# Altium PCB Ultrasonic_mbed_casa.PcbDoc
Units mm, origin at the board's own origin, x right, y up, seen from the top; angles counter-clockwise.
Board outline 100 x 86.6 mm, 2 copper layers (Top Layer, Bottom Layer); 20 components, 28 nets, 116 pads, 8 vias.
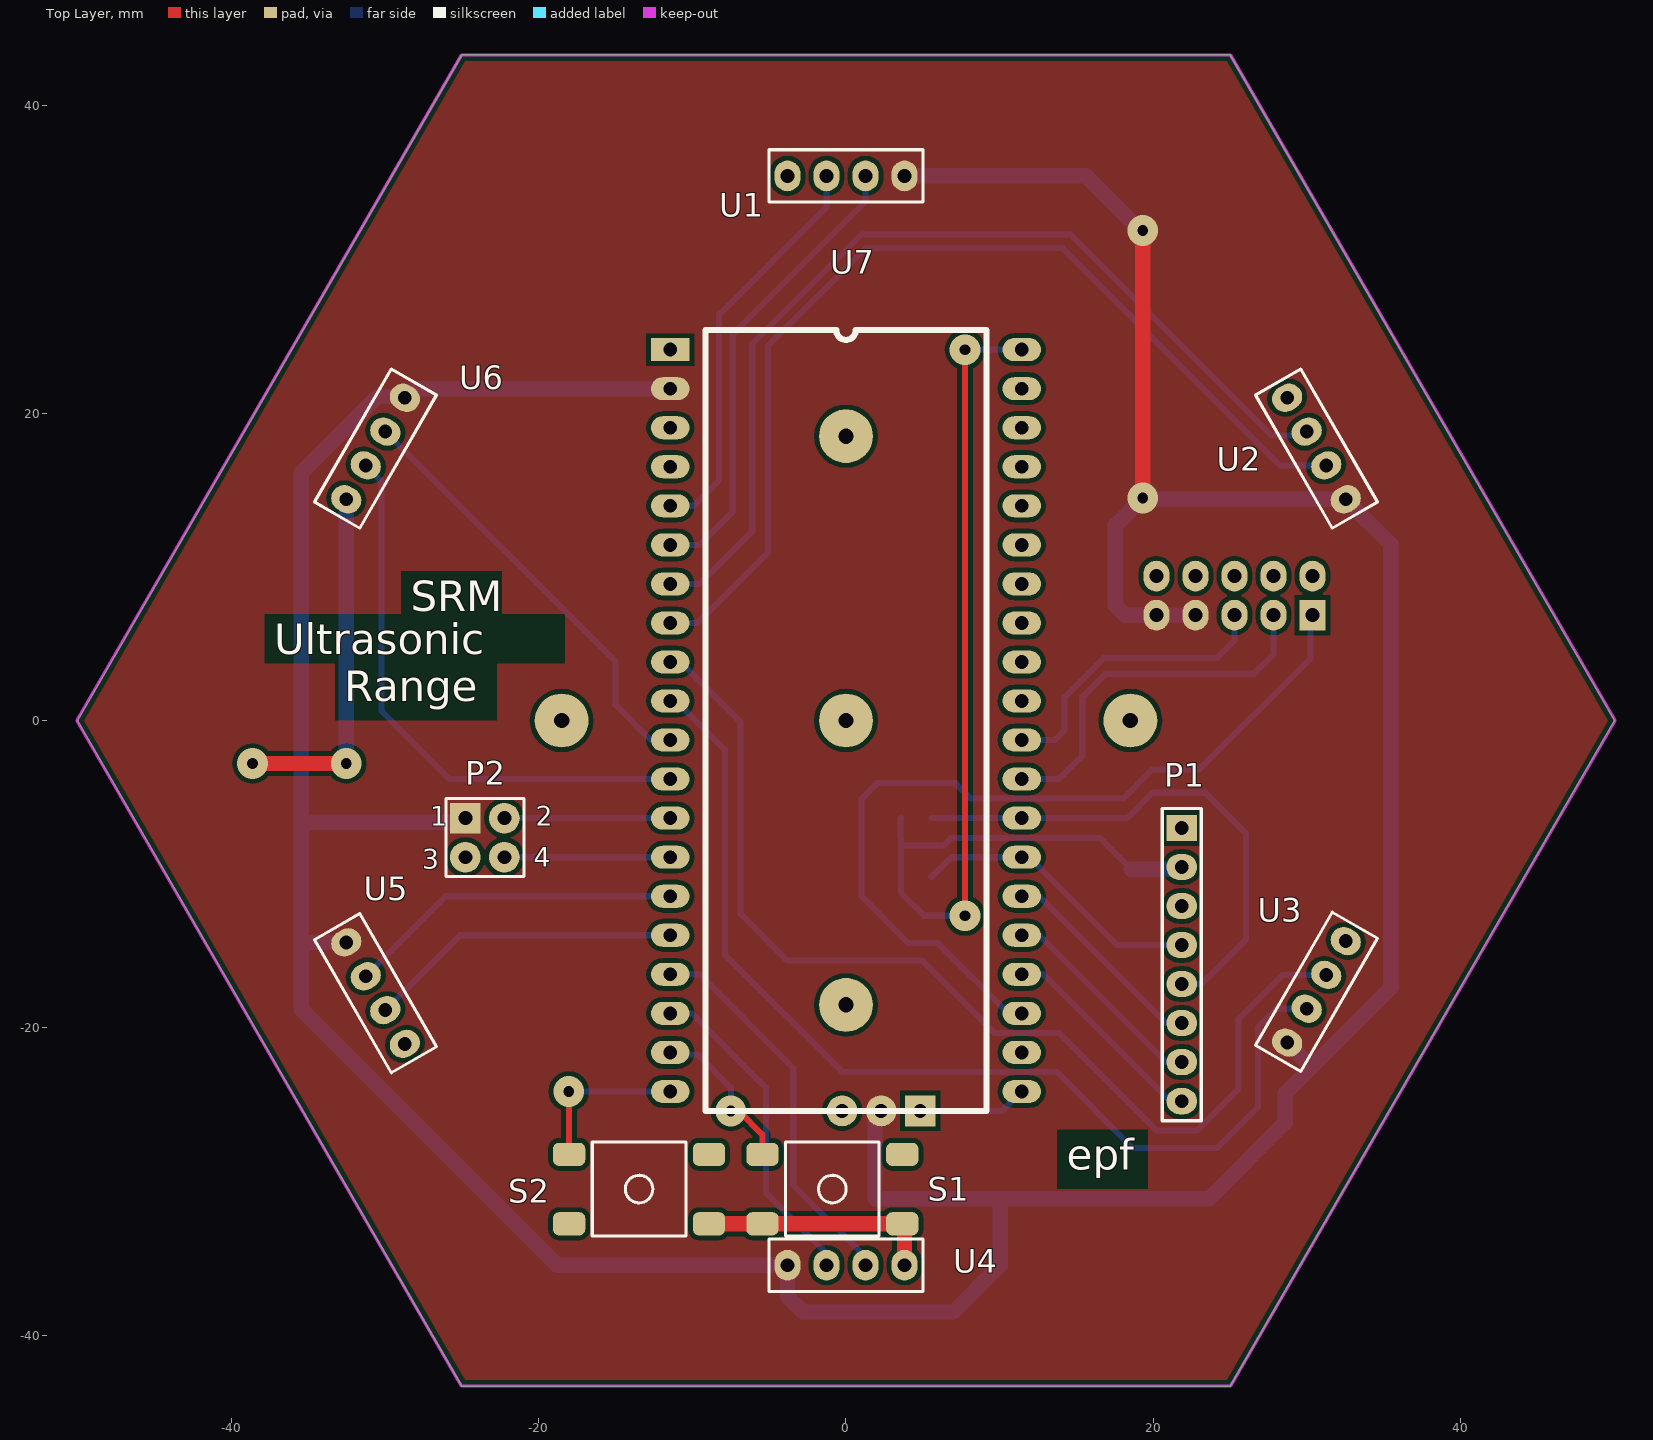
[diagram p0: Top Layer view]
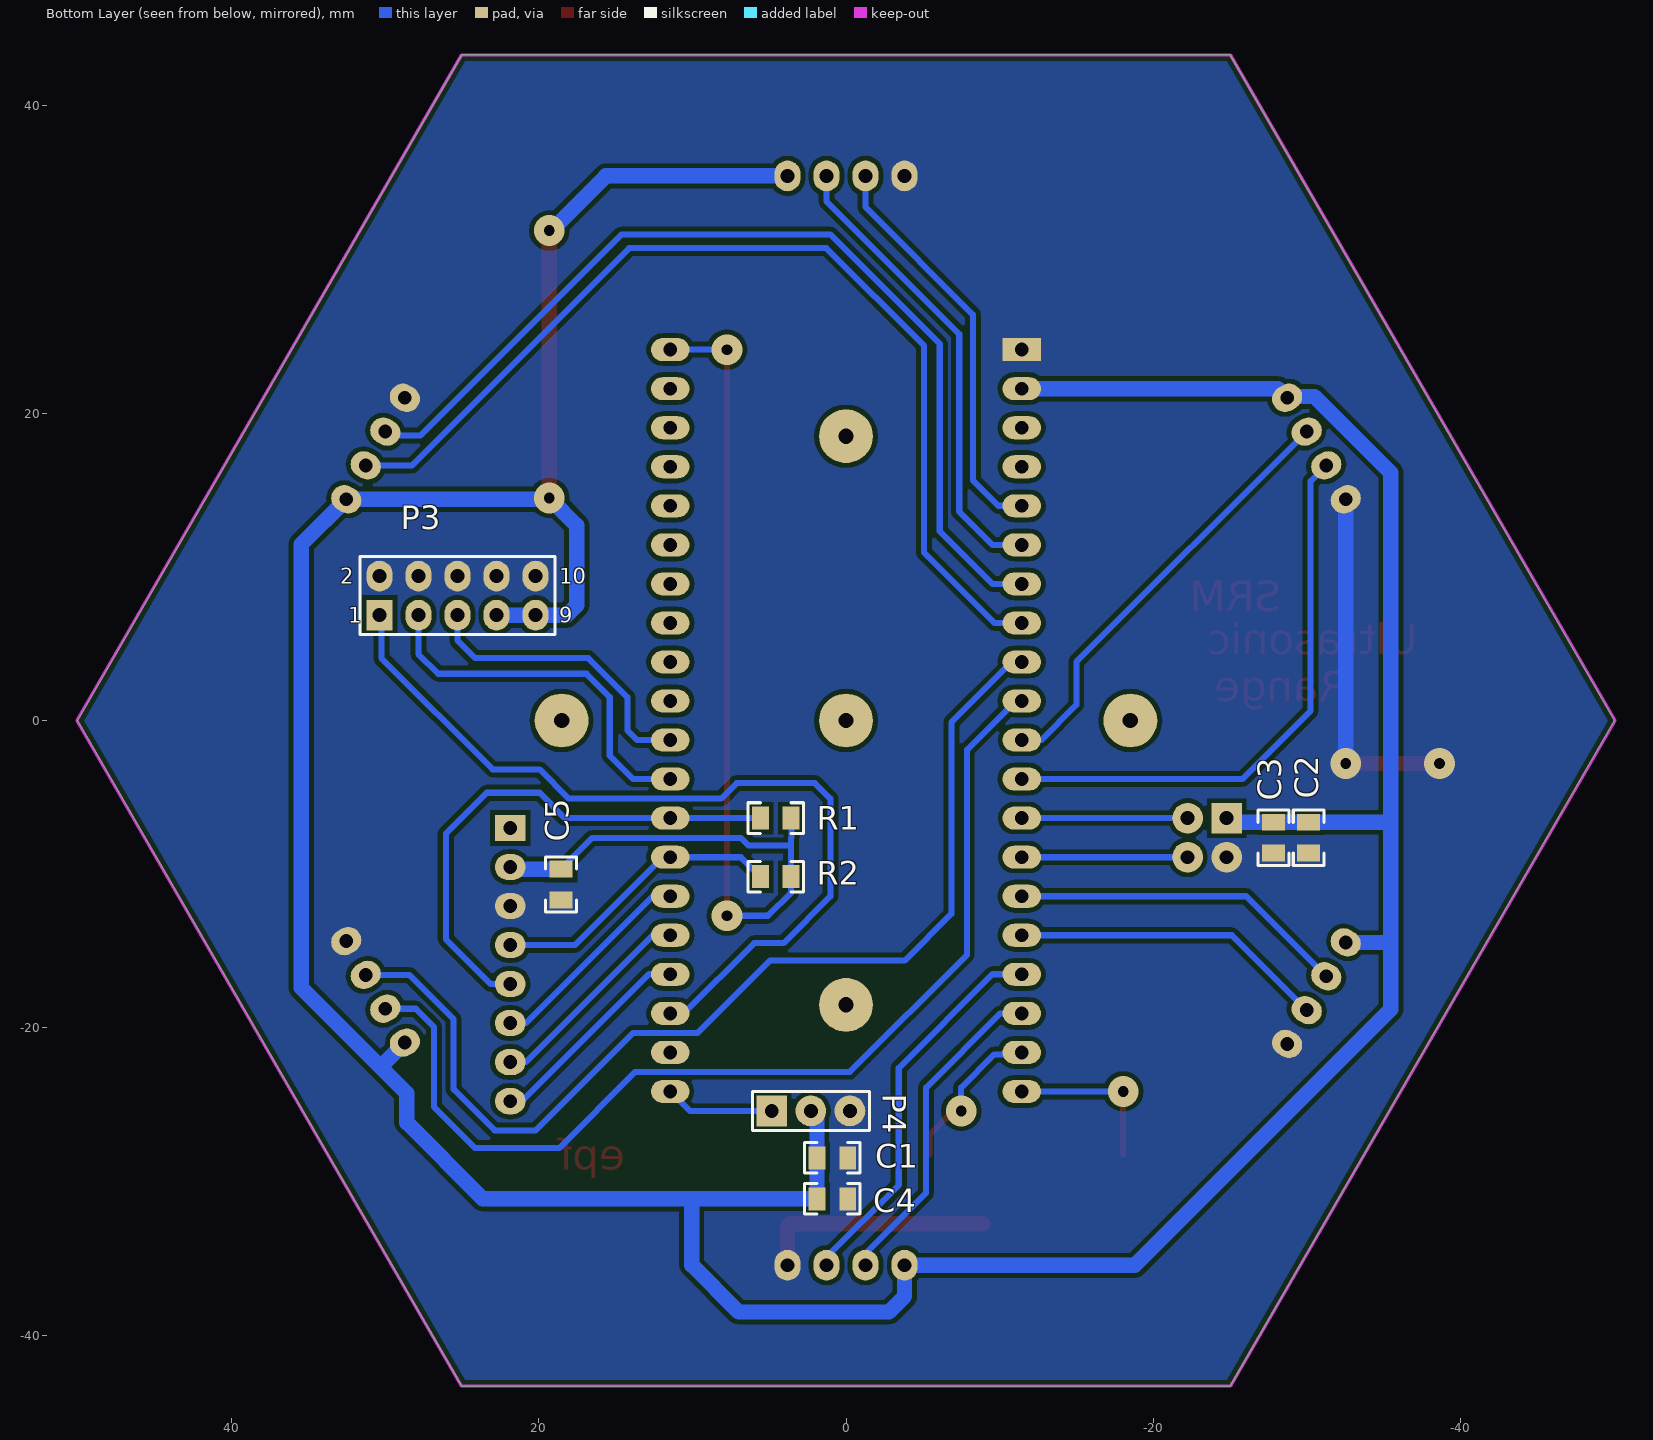
[diagram p1: Bottom Layer view, seen from below]

## Layer stack, top to bottom
Top Layer: signal copper 0.0356
Dielectric: dielectric 0.32, FR-4, Dk 4.8
Bottom Layer: signal copper 0.0356

## Board outline
25,-43.301 50,0 25,43.301 -25,43.301 -50,0 -25,-43.301

## Design rules (kind name [scope] priority, off if disabled: settings)
Clearance [All] p1: gap=0.3
MinimumAnnularRing [All] p1: minimumring=0.254
PolygonConnect [All] p1: connectstyle=Direct reliefconductorwidth=0.254 reliefentries=4 polygonreliefangle="90 Angle"
RoutingVias [All] p1: holewidth=0.8 width=1.5 viastyle="Through Hole" minholewidth=0.4 minwidth=0.9 maxholewidth=2 maxwidth=3
SilkscreenOverComponentPads [All] p1: minsilkscreentomaskgap=0.254
SolderMaskExpansion [All] p1: expansion=0.102
Width [All] p1: maxlimit=3 minlimit=0.3 preferedwidth=0.4
27 further rules are at their usual default settings.

## Components (designator, comment, footprint, x,y, rotation, side; value= is the part's Value field where it differs from the comment)
C1 "Capacitor" CAP0805 0.889,-28.448 r0 bottom
C2 "Capacitor" CAP0805 -30.099,-7.62 r90 bottom
C3 "Capacitor" CAP0805 -27.813,-7.62 r90 bottom
C4 "Capacitor" CAP0805 0.889,-31.115 r0 bottom
C5 "Capacitor" CAP0805 18.542,-10.668 r90 bottom
P1 "Header 8" HDR1X8 21.844,-6.985 r270 top
P2 "Header 2X2" HDR2X2 -24.765,-6.35 r270 top
P3 "NXT" HDR2X5 30.353,6.858 r180 bottom
P4 "Servo" HDR1X3 4.826,-25.4 r180 bottom
R1 "Resistor" RES0805 4.572,-6.35 r0 bottom
R2 "Resistor" RES0805 4.572,-10.16 r0 bottom
S1 "SW-PB" "SW-PB6mm - 2" -0.889,-30.48 r0 top
S2 "SW-PB" "SW-PB6mm - 2" -13.462,-30.48 r0 top
U1 "HC-SR04" HC-SR04 3.81,35.433 r180 top
U2 "HC-SR04" HC-SR04 32.512,14.397 r120 top
U3 "HC-SR04" HC-SR04 28.702,-20.95 r60 top
U4 "HC-SR04" HC-SR04 -3.81,-35.433 r0 top
U5 "HC-SR04" HC-SR04 -32.512,-14.437 r300 top
U6 "HC-SR04" HC-SR04 -28.702,20.996 r240 top
U7 "mbed" mbed -11.43,24.13 r0 top

## Footprints (in the part's own frame and the unit in brackets; to place one, negate y for a bottom-side part, rotate by r counter-clockwise, add the part's x,y. Pads: shape width x height; smd on the part's side, far side on the other; paste and mask are expansions set on the pad)
CAP0805 [mm]
  rect 1.1x1.5 smd: 1(-1,0) 2(1,0)
  silkscreen extent -1.8,-1 1.8,1, body extent -1,-0.62 1,0.63, height 0.5
HC-SR04 [mm]
  oval 1.7x2 hole 0.9: 1(0,0) 2(2.54,0) 3(5.08,0) 4(7.62,0)
  silkscreen extent -1.19,-1.7 8.81,1.7, body extent -17.74,-15.82 25.26,0.18, height 21.13
HDR1X3 [mm] "Connector; Header; 3 Position"
  rect 2x2 hole 0.9: 1(0,0)
  round 2 hole 0.9: 2(2.54,0) 3(5.08,0)
  silkscreen extent -1.27,-1.27 6.35,1.27
HDR1X8 [mm] "Connector; Header; 8 Position"
  rect 1.7x2 hole 0.9: 1(0,0)
  oval 1.7x2 hole 0.9: 2(2.54,0) 3(5.08,0) 4(7.62,0) 5(10.16,0) 6(12.7,0) 7(15.24,0) 8(17.78,0)
  silkscreen extent -1.27,-1.27 19.05,1.27
HDR2X2 [mm] "Connector; Header; 2x2 Position"
  rect 2x2 hole 0.9: 1(0,0)
  round 2 hole 0.9: 2(0,2.54) 3(2.54,0) 4(2.54,2.54)
  silkscreen extent -1.27,-1.27 3.81,3.81
HDR2X5 [mm] "Connector; Header; 5x2 Position"
  rect 1.7x2 hole 0.9: 1(0,0)
  oval 1.7x2 hole 0.9: 2(0,2.54) 3(2.54,0) 4(2.54,2.54) 5(5.08,0) 6(5.08,2.54) 7(7.62,0) 8(7.62,2.54) 9(10.16,0) 10(10.16,2.54)
  silkscreen extent -1.27,-1.27 11.43,3.81, body extent -1.27,-1.27 11.41,3.81, height 8.55
mbed [mm]
  rect 2.5x1.5 hole 0.9: 1(0,0)
  oval 2.5x1.5 hole 0.9: 2(0,-2.54) 3(0,-5.08) 4(0,-7.62) 5(0,-10.16) 6(0,-12.7) 7(0,-15.24) 8(0,-17.78) 9(0,-20.32) 10(0,-22.86) 11(0,-25.4) 12(0,-27.94) 13(0,-30.48) 14(0,-33.02) 15(0,-35.56) 16(0,-38.1) 17(0,-40.64) 18(0,-43.18) 19(0,-45.72) 20(0,-48.26) 21(22.86,-48.26) 22(22.86,-45.72) 23(22.86,-43.18) 24(22.86,-40.64) 25(22.86,-38.1) 26(22.86,-35.56) 27(22.86,-33.02) 28(22.86,-30.48) 29(22.86,-27.94) 30(22.86,-25.4) 31(22.86,-22.86) 32(22.86,-20.32) 33(22.86,-17.78) 34(22.86,-15.24) 35(22.86,-12.7) 36(22.86,-10.16) 37(22.86,-7.62) 38(22.86,-5.08) 39(22.86,-2.54) 40(22.86,0)
  silkscreen extent 2.29,-49.53 20.57,1.27
RES0805 [mm]
  rect 1.1x1.5 smd: 1(-1,0) 2(1,0)
  silkscreen extent -1.8,-1 1.8,1, body extent -1,-0.62 1,0.63, height 0.5
"SW-PB6mm - 2" [mm]
  rrect50% 2.1x1.5 smd: 1(-4.55,2.26) 1(4.55,2.26) 2(-4.55,-2.26) 2(4.55,-2.26)
  silkscreen extent -3.05,-3.05 3.05,3.05, body extent -4.5,-3 4.5,3, height 5

## Part data
C1 C2 C3 C4 C5: library part Cap
P1: "Header, 8-Pin"
P2: "Header, 2-Pin, Dual row"
P3: library part "Header 5X2", "Header, 5-Pin, Dual row"
P4: library part "Header 3", "Header, 3-Pin"
R1 R2: library part Res
S1 S2: "Switch"
U1 U2 U3 U4 U5 U6: "Ultrasonic module"

## Free pads (board coordinates)
  round 3.5 hole 1: 1(-18.5,0) 1(0,-18.5) 1(0,0) 1(0,18.5) 1(18.5,0)

## Via types
v1: diameter 2, hole 0.7, Top Layer to Bottom Layer, 8 vias

## Nets (pads, with @x,y where several pads share a name; then routed paths per layer and width w, separated by ;. In a path a pad name is that pad's centre, name@x,y a point inside that pad or via, vN(x,y) a via of type N, cw(c..) or ccw(c..) an arc to the next point about the centre after c; other vN are vias at no path point)
3V3: C5.2 P1.2 R1.1 R2.1 U7.40 | length 69.5
  Top Layer w0.4: v1(7.747,-12.7) v1(7.747,24.13)
  Bottom Layer w0.4: R1.1 3.556,-6.366 3.556,-7.62 3.572,-7.636 3.572,-8.128 ; v1(7.747,-12.7) 5.08,-12.7 3.572,-11.192 R2.1 3.572,-8.128 ; v1(7.747,24.13) U7.40 ; C5.2 16.514,-7.64 6.838,-7.64 6.35,-8.128 3.572,-8.128
  Bottom Layer w1: C5.2 21.701,-9.668 P1.2
A_INT1: P1.7 U7.25 | length 13.8
  Bottom Layer w0.4: U7.25 12.573,-13.97 20.828,-22.225 P1.7
ECHO1: U1.3 U7.5 | length 26.6
  Bottom Layer w0.4: U7.5 -9.906,13.97 -8.255,15.621 -8.255,26.416 -1.27,33.401 U1.3
ECHO2: U2.3 U7.7 | length 63.5
  Bottom Layer w0.4: U7.7 -9.525,8.89 -6.096,12.319 -6.096,24.511 1.016,31.623 14.605,31.623 27.686,18.542 29.718,18.542 U2.3
ECHO3: U3.3 U7.9 | length 69.5
  Bottom Layer w0.4: U7.9 -10.795,3.81 -6.858,-0.127 -6.858,-12.573 -3.81,-15.621 4.953,-15.621 9.652,-20.32 13.843,-20.32 20.193,-26.67 22.86,-26.67 25.527,-24.003 25.527,-19.431 28.407,-16.551 U3.3
ECHO4: U4.3 U7.17 | length 25.3
  Bottom Layer w0.4: U7.17 -9.525,-16.51 -3.429,-22.606 -3.429,-30.226 1.27,-34.925 U4.3
ECHO5: U5.3 U7.16 | length 20.6
  Bottom Layer w0.4: U5.3 -25.105,-13.97 U7.16
ECHO6: U6.3 U7.12 | length 37
  Bottom Layer w0.4: U6.3 -30.226,15.58 -30.226,0.635 -25.781,-3.81 U7.12
G_INT: P1.8 U7.24 | length 13.8
  Bottom Layer w0.4: U7.24 12.827,-16.51 21.082,-24.765 P1.8
GND: C1.1 C2.1 C3.1 C4.1 C5.1 P1.3 P2.3 P3.2 P3.4 P3.6 P3.8 P3.10 P4.3 S1.2 S2.2@-8.912,-32.74 U1.4 U2.4 U3.4 U4.4 U5.4 U6.4 U7.1 | length 38.6
  Top Layer w1: v1(-38.608,-2.794) v1(-32.512,-2.794) ; S2.2@-8.912,-32.74 -5.439,-32.74 3.661,-32.74 3.81,-32.889 U4.4
  Bottom Layer w1: v1(-32.512,-2.794) U6.4
M_DRDY: P1.6 U7.26 | length 13.8
  Bottom Layer w0.4: U7.26 12.573,-11.43 20.828,-19.685 P1.6
NXT1: P3.1 U7.23 | length 56.6
  Bottom Layer w0.4: U7.23 10.541,-19.05 5.969,-14.478 4.064,-14.478 1.016,-11.43 1.016,-5.08 2.032,-4.064 7.112,-4.064 8.128,-5.08 18.034,-5.08 19.939,-3.175 22.987,-3.175 30.226,4.064 30.226,6.731 P3.1
NXT2: P3.3 U7.29 | length 24.5
  Bottom Layer w0.4: U7.29 13.843,-3.81 15.367,-2.286 15.367,1.524 16.891,3.048 26.543,3.048 27.813,4.318 P3.3
NXT3: P3.5 U7.30 | length 19.4
  Bottom Layer w0.4: U7.30 13.589,-1.27 14.224,-0.635 14.224,1.524 16.764,4.064 24.13,4.064 25.273,5.207 P3.5
PB1: S1.1@-5.439,-28.22 U7.19 | length 10.4
  Top Layer w0.4: v1(-7.493,-25.4) -6.985,-25.4 -5.439,-26.946 S1.1@-5.439,-28.22
  Bottom Layer w0.4: U7.19 -11.303,-21.717 -9.652,-21.717 -7.493,-23.876 v1(-7.493,-25.4)
PB2: S2.1@-18.012,-28.22 U7.20 | length 10.7
  Top Layer w0.4: v1(-18.034,-24.13) -18.012,-24.152 S2.1@-18.012,-28.22
  Bottom Layer w0.4: v1(-18.034,-24.13) U7.20
RX: P2.4 U7.14 | length 10.8
  Bottom Layer w0.4: P2.4 U7.14
SCL: P1.4 R2.2 U7.27 | length 19.2
  Bottom Layer w0.4: R2.2 6.842,-8.89 U7.27 11.938,-8.89 17.653,-14.605 P1.4
SDA: P1.5 R1.2 U7.28 | length 34.5
  Bottom Layer w0.4: R1.2 U7.28 18.288,-6.35 19.939,-4.699 23.368,-4.699 26.035,-7.366 26.035,-14.224 23.114,-17.145 P1.5
SERVO1: P4.1 U7.21 | length 7.1
  Bottom Layer w0.4: P4.1 10.16,-25.4 U7.21
TRIG1: U1.2 U7.6 | length 30.4
  Bottom Layer w0.4: U7.6 -9.525,11.43 -7.366,13.589 -7.366,25.146 1.27,33.782 U1.2
TRIG2: U2.2 U7.8 | length 66.5
  Bottom Layer w0.4: U7.8 -9.652,6.35 -5.08,10.922 -5.08,24.384 1.27,30.734 14.097,30.734 28.235,16.596 U2.2
TRIG3: U3.2 U7.10 | length 68.1
  Bottom Layer w0.4: U7.10 -11.049,1.27 -7.874,-1.905 -7.874,-15.24 -0.254,-22.86 13.716,-22.86 18.669,-27.813 24.13,-27.813 26.797,-25.146 26.797,-19.939 27.986,-18.75 U3.2
TRIG4: U4.2 U7.18 | length 21.4
  Bottom Layer w0.4: U7.18 -10.033,-19.05 -5.207,-23.876 -5.207,-30.734 -1.27,-34.671 U4.2
TRIG5: U5.2 U7.15 | length 22
  Bottom Layer w0.4: U5.2 -26.035,-11.43 U7.15
TRIG6: U6.2 U7.11 | length 28.5
  Bottom Layer w0.4: U6.2 -14.986,3.81 -14.986,1.016 -12.7,-1.27 U7.11
TX: P2.2 U7.13 | length 10.8
  Bottom Layer w0.4: P2.2 U7.13
VCC: C1.2 C2.2 C3.2 C4.2 P2.1 P3.7 P3.9 P4.2 U1.1 U2.1 U3.1 U4.1 U5.1 U6.1 U7.2 | length 277.8
  Top Layer w1: v1(19.304,14.478) v1(19.304,31.877)
  Bottom Layer w1: U5.1 -35.392,-14.437 -35.433,-14.478 ; P2.1 -25.035,-6.62 C3.2 C2.2 -35.417,-6.62 -35.433,-6.604 ; U7.2 -28.108,21.59 U6.1 -28.788,21.082 -30.48,21.082 -35.433,16.129 -35.433,-6.604 ; P4.2 1.889,-25.797 C1.2 C4.2 10.033,-31.115 ; U1.1 15.621,35.433 19.304,31.75 v1(19.304,31.877) ; P3.7 18.161,6.858 17.526,7.493 17.526,12.7 19.223,14.397 U2.1 35.433,11.476 35.433,-17.399 30.226,-22.606 ; U3.1 30.226,-22.474 30.226,-22.606 ; -35.433,-14.478 -35.433,-18.796 -18.796,-35.433 U4.1 -3.81,-37.465 -2.794,-38.481 6.985,-38.481 10.033,-35.433 10.033,-31.115 ; -35.433,-14.478 -35.433,-6.604 ; 10.033,-31.115 23.622,-31.115 28.575,-26.162 28.575,-24.257 30.226,-22.606
pads on no net: P1.1 S1.1@3.661,-28.22 S2.1@-8.912,-28.22 S2.2@-18.012,-32.74 U7.3 U7.4 U7.22 U7.31 U7.32 U7.33 U7.34 U7.35 U7.36 U7.37 U7.38 U7.39

## Polygon pours and split planes (outlines as drawn)
VCC on Top Layer "VCC_TOP" (solid, remove dead copper, pour order 4): 25.019,-43.307 -25.019,-43.307 -50.038,0 -25.019,43.307 25.019,43.307 50.038,0
GND on Bottom Layer "GND_Bottom" (solid, remove dead copper, pour order 5): 25.019,-43.307 -25.019,-43.307 -50.038,0 -25.019,43.307 25.019,43.307 50.038,0

## Keep-outs
Keep-Out Layer:
  lines w0.2: -50.038,0 -25.019,-43.307 25.019,-43.307 50.038,0 25.019,43.307 -25.019,43.307 -50.038,0

## Other copper
Top Layer:
  text "SRM" at -28.321,7.112 h2
  text "Ultrasonic" at -37.211,4.318 h2
  text "Range" at -32.639,1.27 h2
  text "epf" at 14.351,-29.21 h2

## Silkscreen, mask and mechanical layers (free items; w line width, h text height)
Top Overlay:
  text "SRM" at -28.321,7.112 h2
  text "Ultrasonic" at -37.211,4.318 h2
  text "Range" at -32.639,1.27 h2
  text "epf" at 14.351,-29.21 h2
Borde:
  lines w0.2: -50.038,0 -25.019,-43.307 25.019,-43.307 50.038,0 25.019,43.307 -25.019,43.307 -50.038,0
Mechanical 13:
  circle w0.254: c0,0 r35.195
  lines w0.2: -43.334,-25.019 0,0 ; -43.334,25.019 0,0 ; 0,-50.038 0,0 ; 0,50.038 0,0 ; 43.334,-25.019 0,0 ; 43.334,25.019 0,0

## Text inside footprints (layer, text, board x,y; h text height)
P2: Top Overlay "3" at -27.559,-9.652 h1.27; Top Overlay "4" at -20.32,-9.525 h1.27; Top Overlay "2" at -20.193,-6.858 h1.27; Top Overlay "1" at -27.051,-6.858 h1.27
P3: Bottom Overlay "2" at 32.893,8.89 h1; Bottom Overlay "1" at 32.385,6.35 h1; Bottom Overlay "9" at 18.669,6.35 h1; Bottom Overlay "10" at 18.669,8.89 h1